# Allegro board AC7021.brd
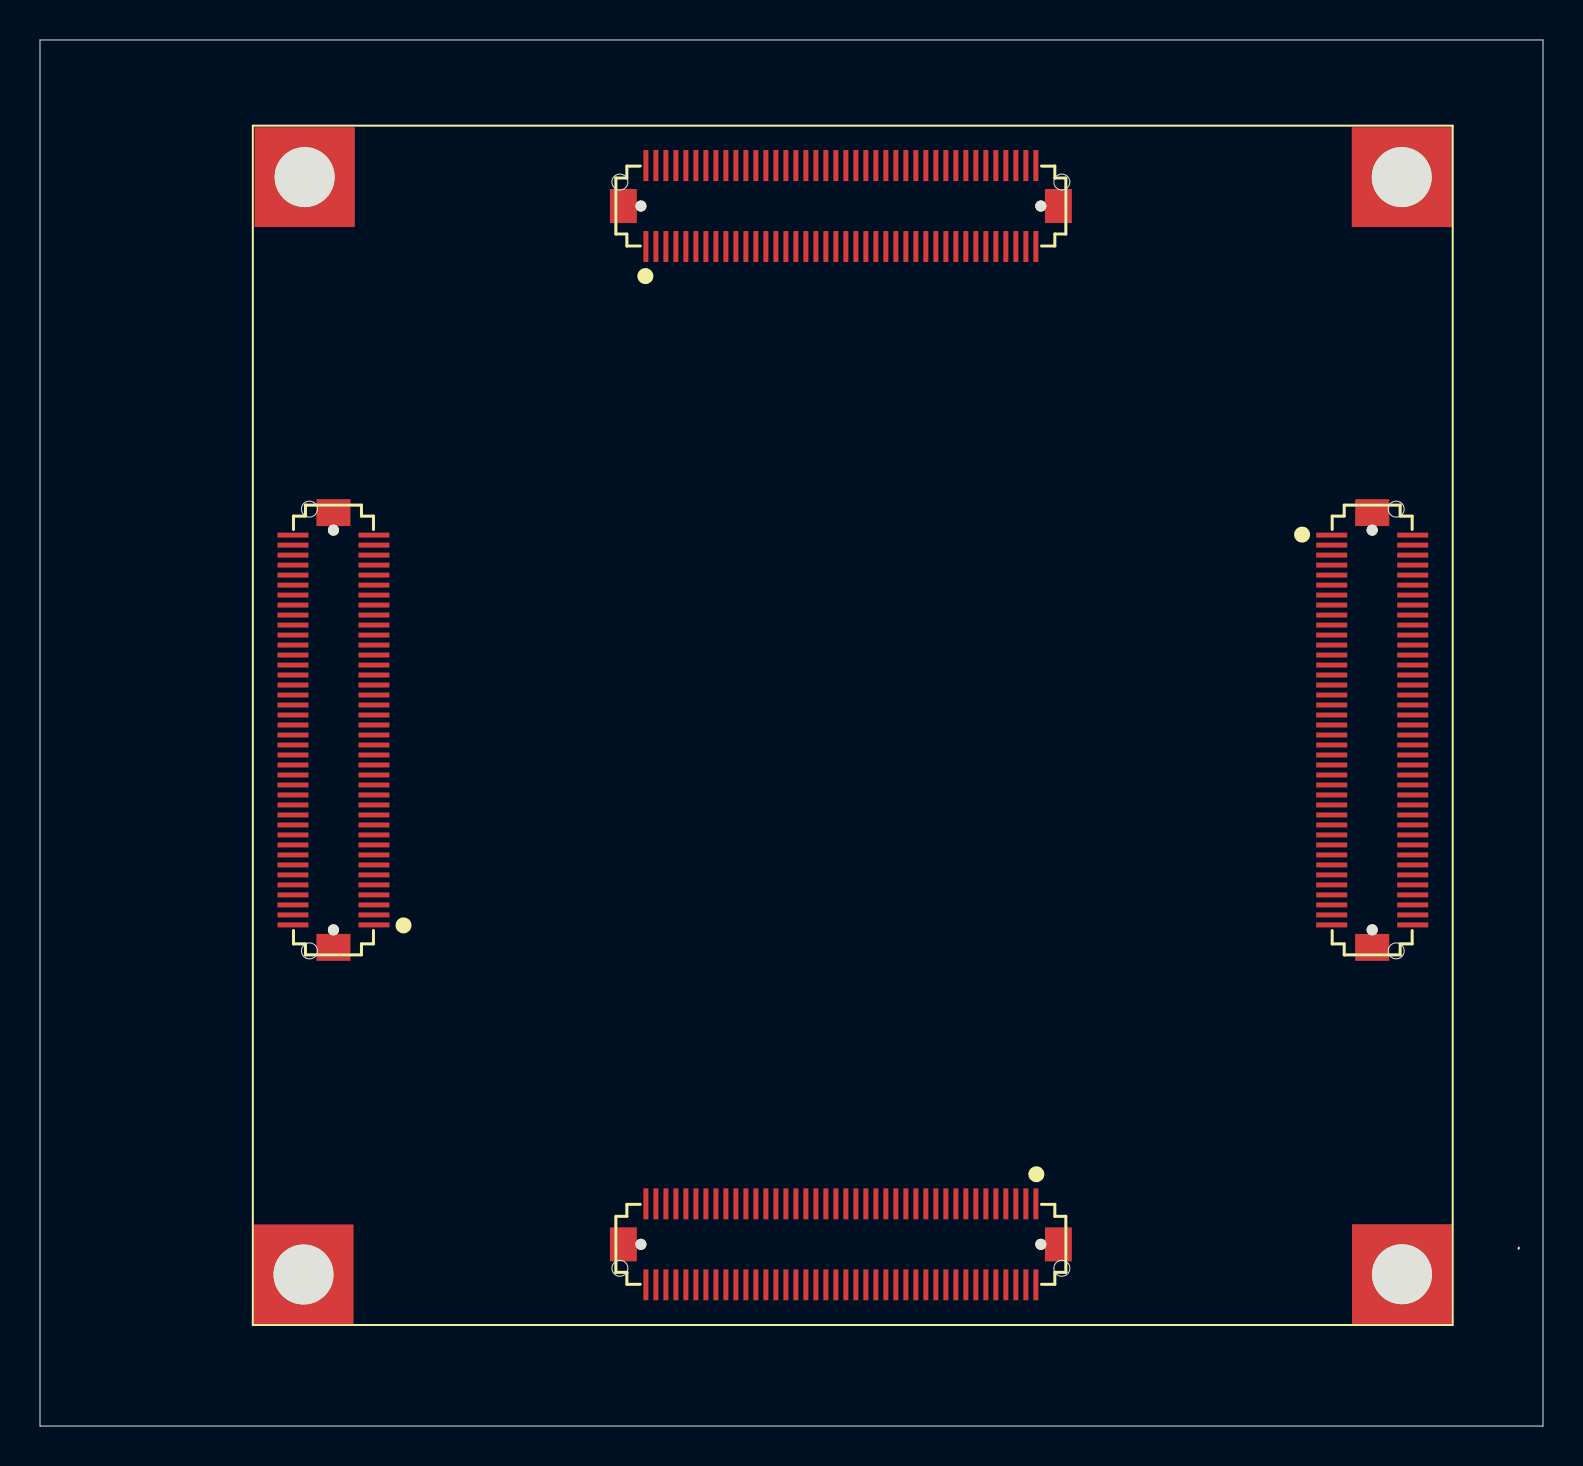
[diagram p0: board, top side]
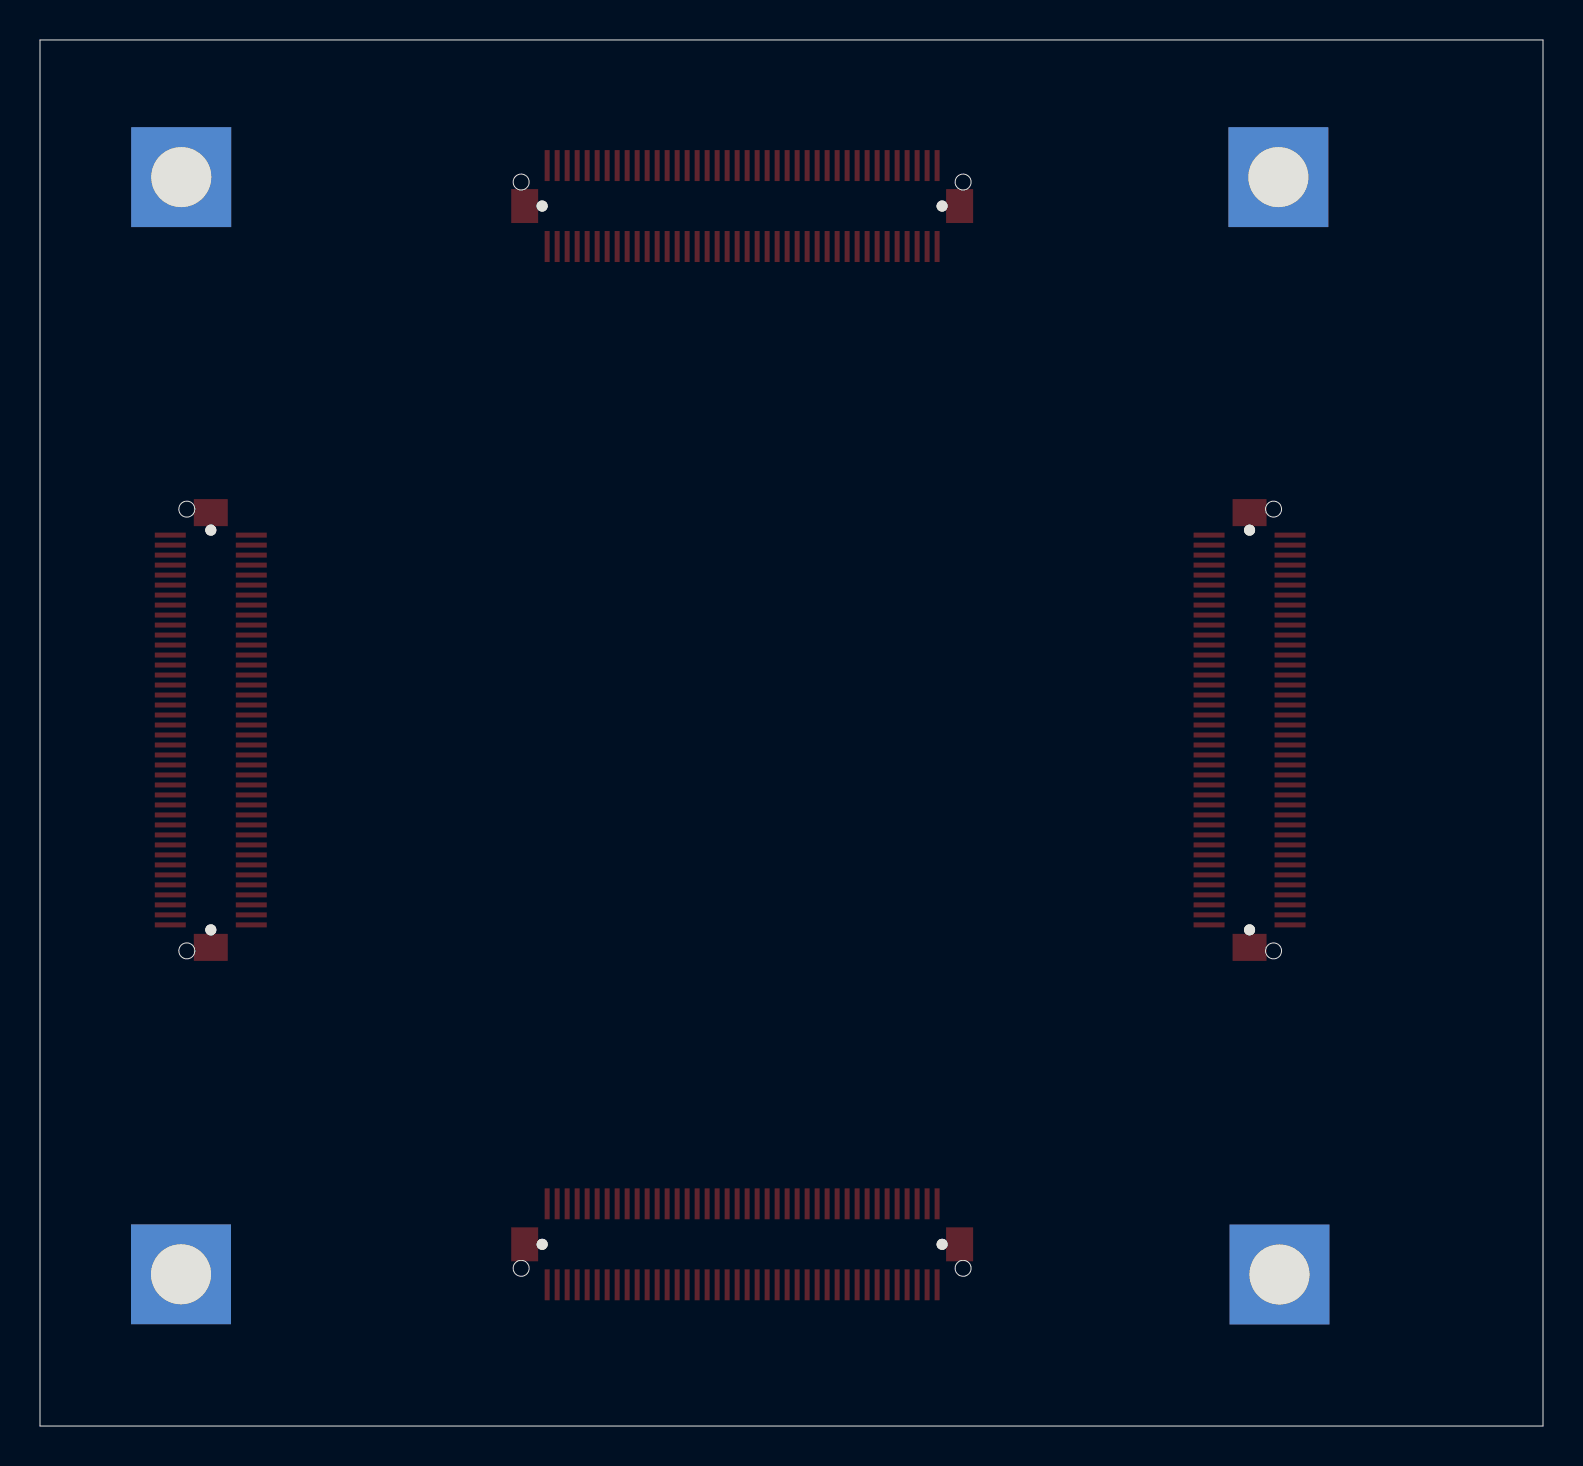
[diagram p1: board, bottom side, seen from below]

Outline 75.16 x 69.34 mm; copper layers: TOP, SGND, SVCC, BOTTOM. Coordinates in mm from the lower left corner of the outline.
Outline path: 0,69.34 75.16,69.34 75.16,0 0,0 0,69.34

## Design rules (mm)
net group EX_IO1_2P: nets EX_IO1_2N EX_IO1_2P
net group EX_IO1_4P: nets EX_IO1_4N EX_IO1_4P
net group EX_IO1_13P: nets EX_IO1_13N EX_IO1_13P
net group EX_IO1_14P: nets EX_IO1_14N EX_IO1_14P
net group EX_IO1_17N: nets EX_IO1_17N IO1_17N
net group EX_IO1_17P: nets EX_IO1_17P IO1_17P
net group EX_IO2_15P: nets IO2_15N IO2_15P
net group EX_IO2_15P1: nets EX_IO2_15N EX_IO2_15P
net group EX_IO2_16P: nets IO2_16N IO2_16P
net group EX_IO2_16P2: nets EX_IO2_16N EX_IO2_16P
net group IO1_4N: nets IO1_4N IO1_4P
net group IO1_13P: nets IO1_13N IO1_13P
net group IO1_14P: nets IO1_14N IO1_14P
net group OTG_D_P: nets OTG_D_N OTG_D_P
net group PHY_MDI0_N: nets PHY2_MDI0_N PHY2_MDI0_P
net group PHY_MDI1_N: nets PHY1_MDI1_N PHY1_MDI1_P
net group PHY_MDI2_P: nets PHY1_MDI2_N PHY1_MDI2_P
net group PHY_MDI3_N: nets PHY1_MDI3_N PHY1_MDI3_P
net group USB1: nets N20065767 N20065769
net group USB2: nets N20328299 N20328339
net group XADC-DIFF: nets XADC_VN XADC_VP
net group DP-DN: nets DN1 DN2 DN3 DN4 DP1 DP2 DP3 DP4
net group ETH_RX: nets PHY1_RXCK PHY1_RXCTL PHY1_RXD0 PHY1_RXD1 PHY1_RXD2 PHY1_RXD3 PHY2_RXCK PHY2_RXCTL PHY2_RXD0 PHY2_RXD1 PHY2_RXD2 PHY2_RXD3 PHY3_RXCK PHY3_RXCTL PHY3_RXD0 PHY3_RXD1 PHY3_RXD2 PHY3_RXD3 PHY4_RXCK PHY4_RXCTL PHY4_RXD0 PHY4_RXD1 PHY4_RXD2 PHY4_RXD3 PHY5_RXCK PHY5_RXCTL PHY5_RXD0 PHY5_RXD1 PHY5_RXD2 PHY5_RXD3
net group ETH_TX: nets PHY1_TXCK PHY1_TXCTL PHY1_TXD0 PHY1_TXD1 PHY1_TXD2 PHY1_TXD3 PHY2_TXCK PHY2_TXCTL PHY2_TXD0 PHY2_TXD1 PHY2_TXD2 PHY2_TXD3 PHY3_TXCK PHY3_TXCTL PHY3_TXD0 PHY3_TXD1 PHY3_TXD2 PHY3_TXD3 PHY4_TXCK PHY4_TXCTL PHY4_TXD0 PHY4_TXD1 PHY4_TXD2 PHY4_TXD3 PHY5_TXCK PHY5_TXCTL PHY5_TXD0 PHY5_TXD1 PHY5_TXD2 PHY5_TXD3
net group HDMI: nets TX_0N TX_0P TX_1N TX_1P TX_2N TX_2P TX_CN TX_CP
net group J11-DIFF: nets EX_IO1_1N EX_IO1_1P EX_IO1_3N EX_IO1_3P EX_IO1_5N EX_IO1_5P EX_IO1_6N EX_IO1_6P EX_IO1_7N EX_IO1_7P EX_IO1_8N EX_IO1_8P EX_IO1_9N EX_IO1_9P EX_IO1_10N EX_IO1_10P EX_IO1_11N EX_IO1_11P EX_IO1_12N EX_IO1_12P EX_IO1_15N EX_IO1_15P EX_IO1_16N EX_IO1_16P IO1_1N IO1_1P IO1_2N IO1_2P IO1_3N IO1_3P IO1_5N IO1_5P IO1_6N IO1_6P IO1_7N IO1_7P IO1_8N IO1_8P IO1_9N IO1_9P IO1_10N IO1_10P IO1_11N IO1_11P IO1_12N IO1_12P IO1_15N IO1_15P IO1_16N IO1_16P
net group J13-DIFF: nets EX_IO2_1N EX_IO2_1P EX_IO2_2N EX_IO2_2P EX_IO2_3N EX_IO2_3P EX_IO2_4N EX_IO2_4P EX_IO2_5N EX_IO2_5P EX_IO2_6N EX_IO2_6P EX_IO2_7N EX_IO2_7P EX_IO2_8N EX_IO2_8P EX_IO2_9N EX_IO2_9P EX_IO2_10N EX_IO2_10P EX_IO2_11N EX_IO2_11P EX_IO2_12N EX_IO2_12P EX_IO2_13N EX_IO2_13P EX_IO2_14N EX_IO2_14P EX_IO2_17N EX_IO2_17P IO2_1N IO2_1P IO2_2N IO2_2P IO2_3N IO2_3P IO2_4N IO2_4P IO2_5N IO2_5P IO2_6N IO2_6P IO2_7N IO2_7P IO2_8N IO2_8P IO2_9N IO2_9P IO2_10N IO2_10P IO2_11N IO2_11P IO2_12N IO2_12P IO2_13N IO2_13P IO2_14N IO2_14P IO2_17N IO2_17P
net group OTG_DATA: nets OTG_CLK OTG_DATA0 OTG_DATA1 OTG_DATA2 OTG_DATA3 OTG_DATA4 OTG_DATA5 OTG_DATA6 OTG_DATA7 OTG_DIR OTG_NXT OTG_STP
net group PHY_MDI: nets PHY1_MDI0_N PHY1_MDI0_P PHY2_MDI1_N PHY2_MDI1_P PHY2_MDI2_N PHY2_MDI2_P PHY2_MDI3_N PHY2_MDI3_P PHY3_MDI0_N PHY3_MDI0_P PHY3_MDI1_N PHY3_MDI1_P PHY3_MDI2_N PHY3_MDI2_P PHY3_MDI3_N PHY3_MDI3_P PHY4_MDI0_N PHY4_MDI0_P PHY4_MDI1_N PHY4_MDI1_P PHY4_MDI2_N PHY4_MDI2_P PHY4_MDI3_N PHY4_MDI3_P PHY5_MDI0_N PHY5_MDI0_P PHY5_MDI1_N PHY5_MDI1_P PHY5_MDI2_N PHY5_MDI2_P PHY5_MDI3_N PHY5_MDI3_P

## Placement (name value [footprint] x y rotation side)
CON1  CON40X2_0_8MM  [1000K-F80E-01L-A]  66.62 34.82 270 top
CON2  CON40X2_0_8MM  [1000K-F80E-01L-A]  40.05 61.03 0 top
CON3  CON40X2_0_8MM  [1000K-F80E-01L-A]  14.67 34.82 90 top
CON4  CON40X2_0_8MM  [1000K-F80E-01L-A]  40.05 9.09 180 top
HOLE1  TEST POINT  [FPAD_1]  13.23 62.48 0 top
HOLE2  TEST POINT  [FPAD_1]  13.18 7.58 0 top
HOLE3  TEST POINT  [FPAD_1]  68.11 7.59 0 top
HOLE4  TEST POINT  [FPAD_1]  68.09 62.48 0 top
NOREF  -  []  112.49 -19.12 90 top
NOREF#2  -  []  -33.44 -10.69 0 top

## Library data of the parts
CON1-CON4 = CON40X2_0_1
HOLE1-HOLE4 = TEST POINT

## Footprints (pads in the part's own frame, mm; a bottom-side part is the same pattern mirrored in y, then rotated)
1000K-F80E-01L-A
  round 0.55 hole 0.55 unplated: (-10,0) (10,0)
  rect 0.25x1.55 smd: 1(-9.75,-2.025) 2(-9.75,2.025) 3(-9.25,-2.025) 4(-9.25,2.025) 5(-8.75,-2.025) 6(-8.75,2.025) 7(-8.25,-2.025) 8(-8.25,2.025) 9(-7.75,-2.025) 10(-7.75,2.025) 11(-7.25,-2.025) 12(-7.25,2.025) 13(-6.75,-2.025) 14(-6.75,2.025) 15(-6.25,-2.025) 16(-6.25,2.025) 17(-5.75,-2.025) 18(-5.75,2.025) 19(-5.25,-2.025) 20(-5.25,2.025) 21(-4.75,-2.025) 22(-4.75,2.025) 23(-4.25,-2.025) 24(-4.25,2.025) 25(-3.75,-2.025) 26(-3.75,2.025) 27(-3.25,-2.025) 28(-3.25,2.025) 29(-2.75,-2.025) 30(-2.75,2.025) 31(-2.25,-2.025) 32(-2.25,2.025) 33(-1.75,-2.025) 34(-1.75,2.025) 35(-1.25,-2.025) 36(-1.25,2.025) 37(-0.75,-2.025) 38(-0.75,2.025) 39(-0.25,-2.025) 40(-0.25,2.025) 41(0.25,-2.025) 42(0.25,2.025) 43(0.75,-2.025) 44(0.75,2.025) 45(1.25,-2.025) 46(1.25,2.025) 47(1.75,-2.025) 48(1.75,2.025) 49(2.25,-2.025) 50(2.25,2.025) 51(2.75,-2.025) 52(2.75,2.025) 53(3.25,-2.025) 54(3.25,2.025) 55(3.75,-2.025) 56(3.75,2.025) 57(4.25,-2.025) 58(4.25,2.025) 59(4.75,-2.025) 60(4.75,2.025) 61(5.25,-2.025) 62(5.25,2.025) 63(5.75,-2.025) 64(5.75,2.025) 65(6.25,-2.025) 66(6.25,2.025) 67(6.75,-2.025) 68(6.75,2.025) 69(7.25,-2.025) 70(7.25,2.025) 71(7.75,-2.025) 72(7.75,2.025) 73(8.25,-2.025) 74(8.25,2.025) 75(8.75,-2.025) 76(8.75,2.025) 77(9.25,-2.025) 78(9.25,2.025) 79(9.75,-2.025) 80(9.75,2.025)
  rect 1.35x1.7 smd: 81(-10.875,0) 84(10.875,0)
FPAD_1
  rect 5x5 hole 3: 1(0,0)

## Nets
GND: CON1.9 CON1.10 CON1.19 CON1.20 CON1.29 CON1.30 CON1.39 CON1.40 CON1.49 CON1.50 CON1.59 CON1.60 CON1.69 CON1.70 CON2.9 CON2.10 CON2.19 CON2.20 CON2.29 CON2.30 CON2.39 CON2.40 CON2.49 CON2.50 CON2.59 CON2.60 CON2.69 CON2.70 CON3.9 CON3.10 CON3.19 CON3.20 CON3.29 CON3.30 CON3.39 CON3.40 CON3.49 CON3.50 CON3.59 CON3.60 CON3.69 CON3.70 CON4.9 CON4.10 CON4.19 CON4.20 CON4.29 CON4.30 CON4.39 CON4.40 CON4.49 CON4.50 CON4.59 CON4.60 CON4.69 CON4.70 HOLE1.1 HOLE2.1 HOLE3.1 HOLE4.1
VCC5V: CON1.1 CON1.2 CON1.3 CON1.4 CON1.5 CON1.6 CON1.7 CON1.8
9134_CLK: CON4.57
9134_D0: CON4.45
9134_D1: CON4.47
9134_D2: CON4.51
9134_D3: CON4.53
9134_D4: CON4.55
9134_D5: CON4.61
9134_D6: CON4.63
9134_D7: CON4.75
9134_D8: CON4.77
9134_D9: CON4.64
9134_D10: CON4.62
9134_D11: CON4.54
9134_D12: CON4.52
9134_D13: CON4.48
9134_D14: CON4.46
9134_D15: CON4.38
9134_D16: CON4.36
9134_D17: CON4.34
9134_D18: CON4.32
9134_D19: CON4.28
9134_D20: CON4.26
9134_D21: CON4.24
9134_D22: CON4.22
9134_D23: CON4.18
9134_DE: CON4.43
9134_HS: CON4.41
9134_INT: CON4.15
9134_MCLK: CON4.33
9134_NRESET: CON4.13
9134_SCK: CON4.17
9134_SCL: CON4.16
9134_SD0: CON4.23
9134_SD1: CON4.25
9134_SD2: CON4.27
9134_SD3: CON4.31
9134_SDA: CON4.14
9134_SPDIF: CON4.35
9134_VS: CON4.37
9134_WS: CON4.21
FPGA_TCK: CON1.78
FPGA_TDI: CON1.80
FPGA_TDO: CON1.79
FPGA_TMS: CON1.77
IO1_1N: CON2.51
IO1_1P: CON2.53
IO1_2N: CON2.45
IO1_2P: CON2.47
IO1_3N: CON2.41
IO1_3P: CON2.43
IO1_4N: CON4.44
IO1_4P: CON4.42
IO1_5N: CON4.58
IO1_5P: CON4.56
IO1_6N: CON4.67
IO1_6P: CON4.65
IO1_7N: CON4.68
IO1_7P: CON4.66
IO1_8N: CON4.73
IO1_8P: CON4.71
IO1_9N: CON4.74
IO1_9P: CON4.72
IO1_10N: CON4.78
IO1_10P: CON4.76
IO1_11N: CON4.80
IO1_11P: CON4.79
IO1_12N: CON2.15
IO1_12P: CON2.17
IO1_13N: CON2.5
IO1_13P: CON2.7
IO1_14N: CON2.6
IO1_14P: CON2.8
IO1_15N: CON2.2
IO1_15P: CON2.4
IO1_16N: CON3.41
IO1_16P: CON3.43
IO1_17N: CON3.37
IO1_17P: CON3.35
IO2_1N: CON2.13
IO2_1P: CON2.11
IO2_2N: CON2.18
IO2_2P: CON2.16
IO2_3N: CON2.28
IO2_3P: CON2.26
IO2_4N: CON2.34
IO2_4P: CON2.32
IO2_5N: CON2.38
IO2_5P: CON2.36
IO2_6N: CON2.44
IO2_6P: CON2.42
IO2_7N: CON2.48
IO2_7P: CON2.46
IO2_8N: CON2.54
IO2_8P: CON2.52
IO2_9N: CON2.58
IO2_9P: CON2.56
IO2_10N: CON2.64
IO2_10P: CON2.62
IO2_11N: CON2.63
IO2_11P: CON2.61
IO2_12N: CON2.68
IO2_12P: CON2.66
IO2_13N: CON2.78
IO2_13P: CON2.76
IO2_14N: CON2.74
IO2_14P: CON2.72
IO2_15N: CON2.67
IO2_15P: CON2.65
IO2_16N: CON2.73
IO2_16P: CON2.71
IO2_17N: CON2.77
IO2_17P: CON2.75
OTG_CLK: CON1.52
OTG_DATA0: CON1.56
OTG_DATA1: CON1.58
OTG_DATA2: CON1.62
OTG_DATA3: CON1.64
OTG_DATA4: CON1.66
OTG_DATA5: CON1.68
OTG_DATA6: CON1.72
OTG_DATA7: CON1.74
OTG_DIR: CON1.48
OTG_NXT: CON1.54
OTG_RESET: CON1.33
OTG_STP: CON1.46
PHY1_MDC: CON1.42
PHY1_MDIO: CON1.44
PHY1_RESET: CON1.31
PHY1_RXCK: CON1.38
PHY1_RXCTL: CON1.36
PHY1_RXD0: CON1.34
PHY1_RXD1: CON1.32
PHY1_RXD2: CON1.28
PHY1_RXD3: CON1.26
PHY1_TXCK: CON1.22
PHY1_TXCTL: CON1.24
PHY1_TXD0: CON1.12
PHY1_TXD1: CON1.14
PHY1_TXD2: CON1.16
PHY1_TXD3: CON1.18
PHY2_MDC: CON3.3
PHY2_MDIO: CON3.1
PHY2_RESET: CON3.2
PHY2_RXCK: CON3.5
PHY2_RXCTL: CON3.7
PHY2_RXD0: CON3.11
PHY2_RXD1: CON3.13
PHY2_RXD2: CON3.15
PHY2_RXD3: CON3.17
PHY2_TXCK: CON3.23
PHY2_TXCTL: CON3.21
PHY2_TXD0: CON3.33
PHY2_TXD1: CON3.31
PHY2_TXD2: CON3.27
PHY2_TXD3: CON3.25
PHY3_MDC: CON3.34
PHY3_MDIO: CON3.36
PHY3_RESET: CON3.38
PHY3_RXCK: CON3.32
PHY3_RXCTL: CON3.28
PHY3_RXD0: CON3.26
PHY3_RXD1: CON3.24
PHY3_RXD2: CON3.22
PHY3_RXD3: CON3.18
PHY3_TXCK: CON3.14
PHY3_TXCTL: CON3.16
PHY3_TXD0: CON3.4
PHY3_TXD1: CON3.6
PHY3_TXD2: CON3.8
PHY3_TXD3: CON3.12
PHY4_MDC: CON3.74
PHY4_MDIO: CON3.76
PHY4_RESET: CON3.78
PHY4_RXCK: CON3.72
PHY4_RXCTL: CON3.68
PHY4_RXD0: CON3.66
PHY4_RXD1: CON3.64
PHY4_RXD2: CON3.62
PHY4_RXD3: CON3.58
PHY4_TXCK: CON3.54
PHY4_TXCTL: CON3.56
PHY4_TXD0: CON3.44
PHY4_TXD1: CON3.46
PHY4_TXD2: CON3.48
PHY4_TXD3: CON3.52
PHY5_MDC: CON3.47
PHY5_MDIO: CON3.45
PHY5_RESET: CON3.42
PHY5_RXCK: CON3.51
PHY5_RXCTL: CON3.53
PHY5_RXD0: CON3.55
PHY5_RXD1: CON3.57
PHY5_RXD2: CON3.61
PHY5_RXD3: CON3.63
PHY5_TXCK: CON3.67
PHY5_TXCTL: CON3.65
PHY5_TXD0: CON3.77
PHY5_TXD1: CON3.75
PHY5_TXD2: CON3.73
PHY5_TXD3: CON3.71
PL_KEY: CON4.4
PL_LED: CON4.2
PS_KEY: CON1.37
PS_LED: CON1.35
SD_CD: CON1.57
SD_CLK: CON1.61
SD_CMD: CON1.67
SD_D0: CON1.65
SD_D1: CON1.63
SD_D2: CON1.73
SD_D3: CON1.71
UART_RX: CON1.11
UART_TX: CON1.13
XADC_VN: CON1.53
XADC_VP: CON1.51
N20060148: CON4.1
N20060159: CON4.3
N20060167: CON4.11
N20060427: CON2.24
N20060447: CON4.12
N20060632: CON4.5
N20060638: CON4.7
N20060678: CON2.80
N20060724: CON2.79
N20060735: CON3.79
N20060743: CON3.80
N20060756: CON2.3
N20060759: CON2.1
N20060813: CON2.21
N20060821: CON2.23
N20060829: CON2.27
N20060837: CON2.25
N20060845: CON2.33
N20060848: CON2.31
N20060851: CON2.37
N20060854: CON2.35
N20060925: CON2.22
N20060949: CON4.6
N20060952: CON4.8
N20060955: CON2.14
N20060963: CON2.12
N20061029: CON2.55
N20061032: CON2.57

Pads without a net: CON1 15 17 21 23 25 27 41 43 45 47 55 75 76 81 84; CON2 81 84; CON3 81 84; CON4 81 84

## Text on the board
User.11: Notes: | 10.CONTROLLED IMPENDANCE 50 OHM/40 OHM +/-10% | 1.FINISHED PCB THICHNESS:1.6+/-0.2mm | 2.SOLDERMASK:{BLACK} | 3.SILKSCREEN: SM60W/PC521 {WHITE} OR EQUIVALENT | 4.MATERIAL:FR4 or Similar | 5.FINISH: IMMERSION GOLD : NICKEL 2.5um MINIMUM | 6.TOLERANCE: HOLES DIAMETER {NPTH} +/-0.003" | 7.LINE WIDTH/SPACING: +/-20% | 8.ALL VIAS ARE TENTED | 9.CONTROLLED DIFFERENTAIL IMPEDANCE 100 OHM/80 OHM/90 OHM +/-10% | {EDGE TO EDGE/CENTRE TO EDGE} +/-0.005" | LINE WITH IMPEDANCE CHART FOR REFERENCE | HOLES {CENTRE TO CENTRE} +/-0.003" | OUTLINE {DATUM TO HOLES} +/-0.003" | L1 | L4 | L2 | L3 | (GND) | (POWER) | LAYER 1      L1 TOP | LAYER 2      L2 GND | LAYER 3      L3 VCC | LAYER 4      L4 BOTTOM | {DATUM TO EDGE} +/-0.005" | SINGLE ENDED | 50ohm | WIDTH | - | TOP SIDE | GOLD 0.05um MINIMUM | 6mil | {PTH} +/-0.003" | (WIDTH/SPACE) | 6mil/8mil | 3.5mil/12mil | DIFF-PAIR | 100ohm | 0.5oz | 1oz
User.45: FIGURE | SIZE | 8.0 | 12.0 | 31.5 | 35.0 | 40.0 | 51.18 | 118.11 | 137.8 | 21.66 | 129.92 | 55.12x31.5 | 70.87x50.87 | 88.42x68.42 | 94.49x31.5 | 102.36x31.5 | DRILL CHART | ALL UNITS ARE IN MILS | TOLERANCE | +3.0/-3.0 | PLATED | NON-PLATED | QTY | 125 | 789 | 16 | 80 | 6 | 50 | 20 | 4 | 8 | 10 | 2 | 1
